# Altium PCB PCB1.PcbDoc
Units mil, origin at the board's own origin, x right, y up, seen from the top; angles counter-clockwise.
Board outline 6000 x 4000 mil, 2 copper layers (Top Layer, Bottom Layer); 15 components, 31 nets, 115 pads, 9 vias.
Unrouted connection lines stored in the file: 4.
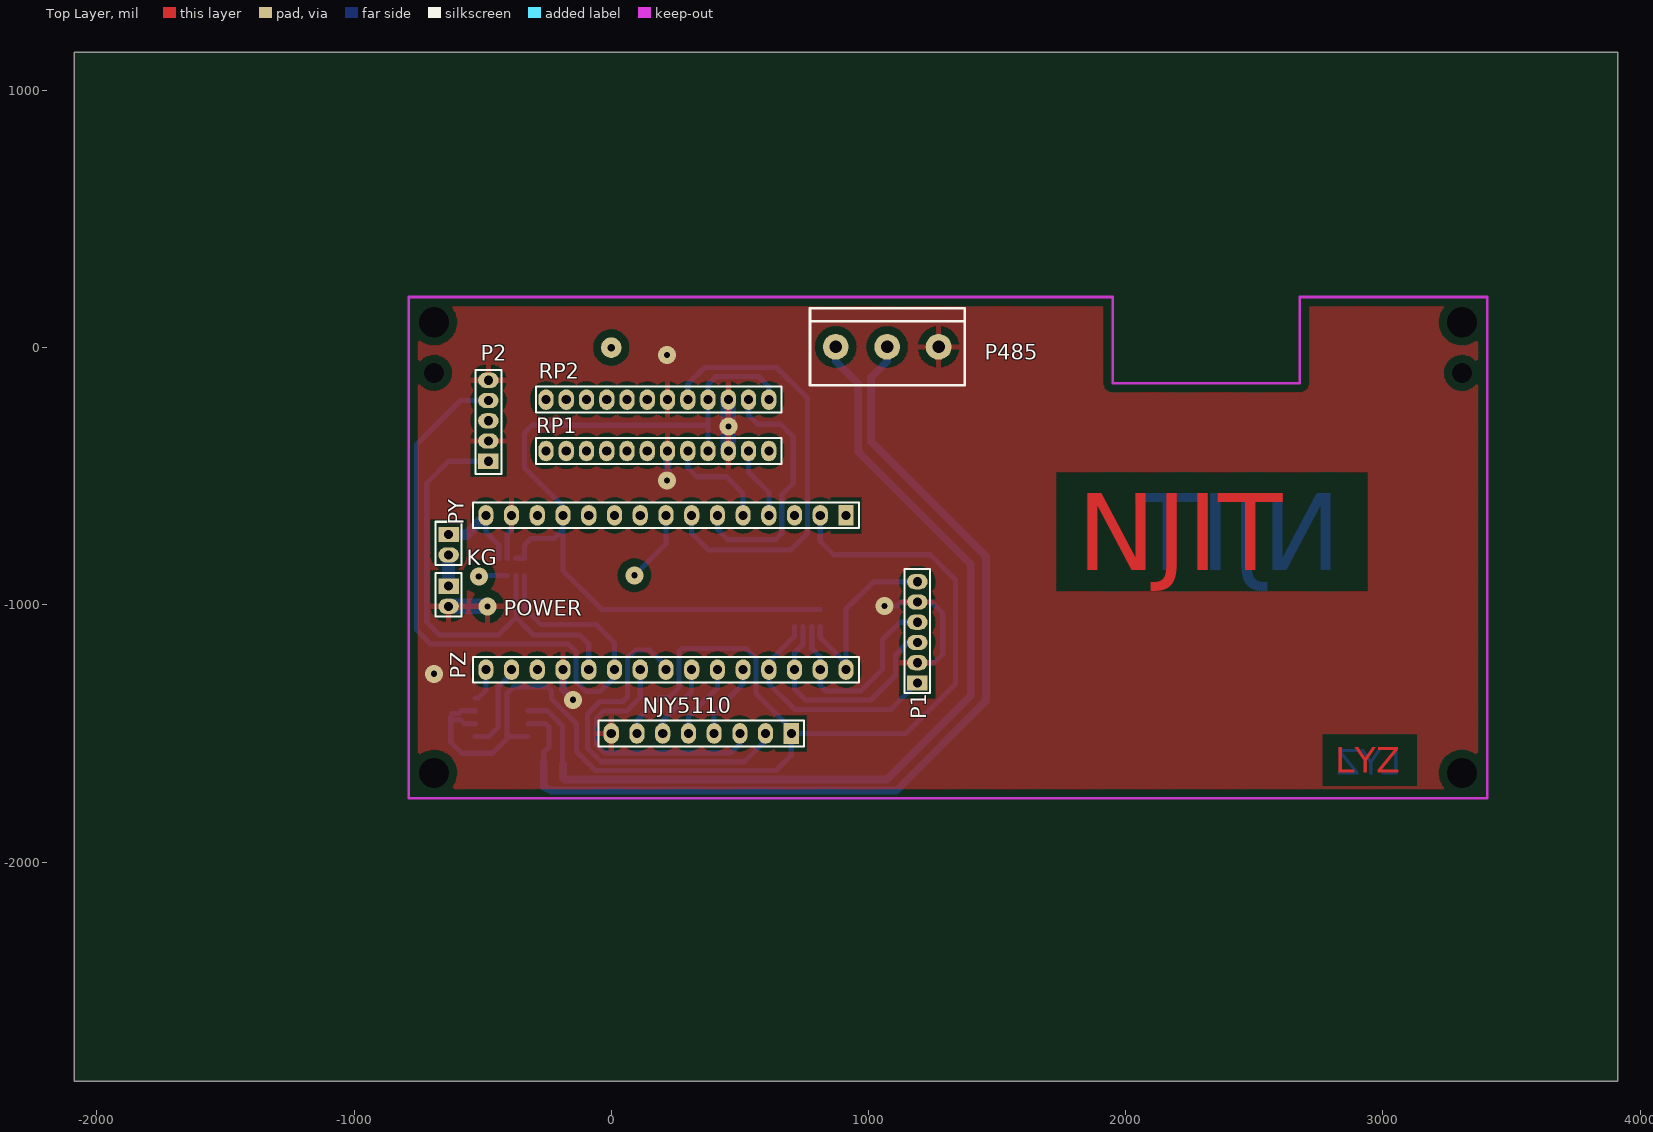
[diagram p0: Top Layer view]
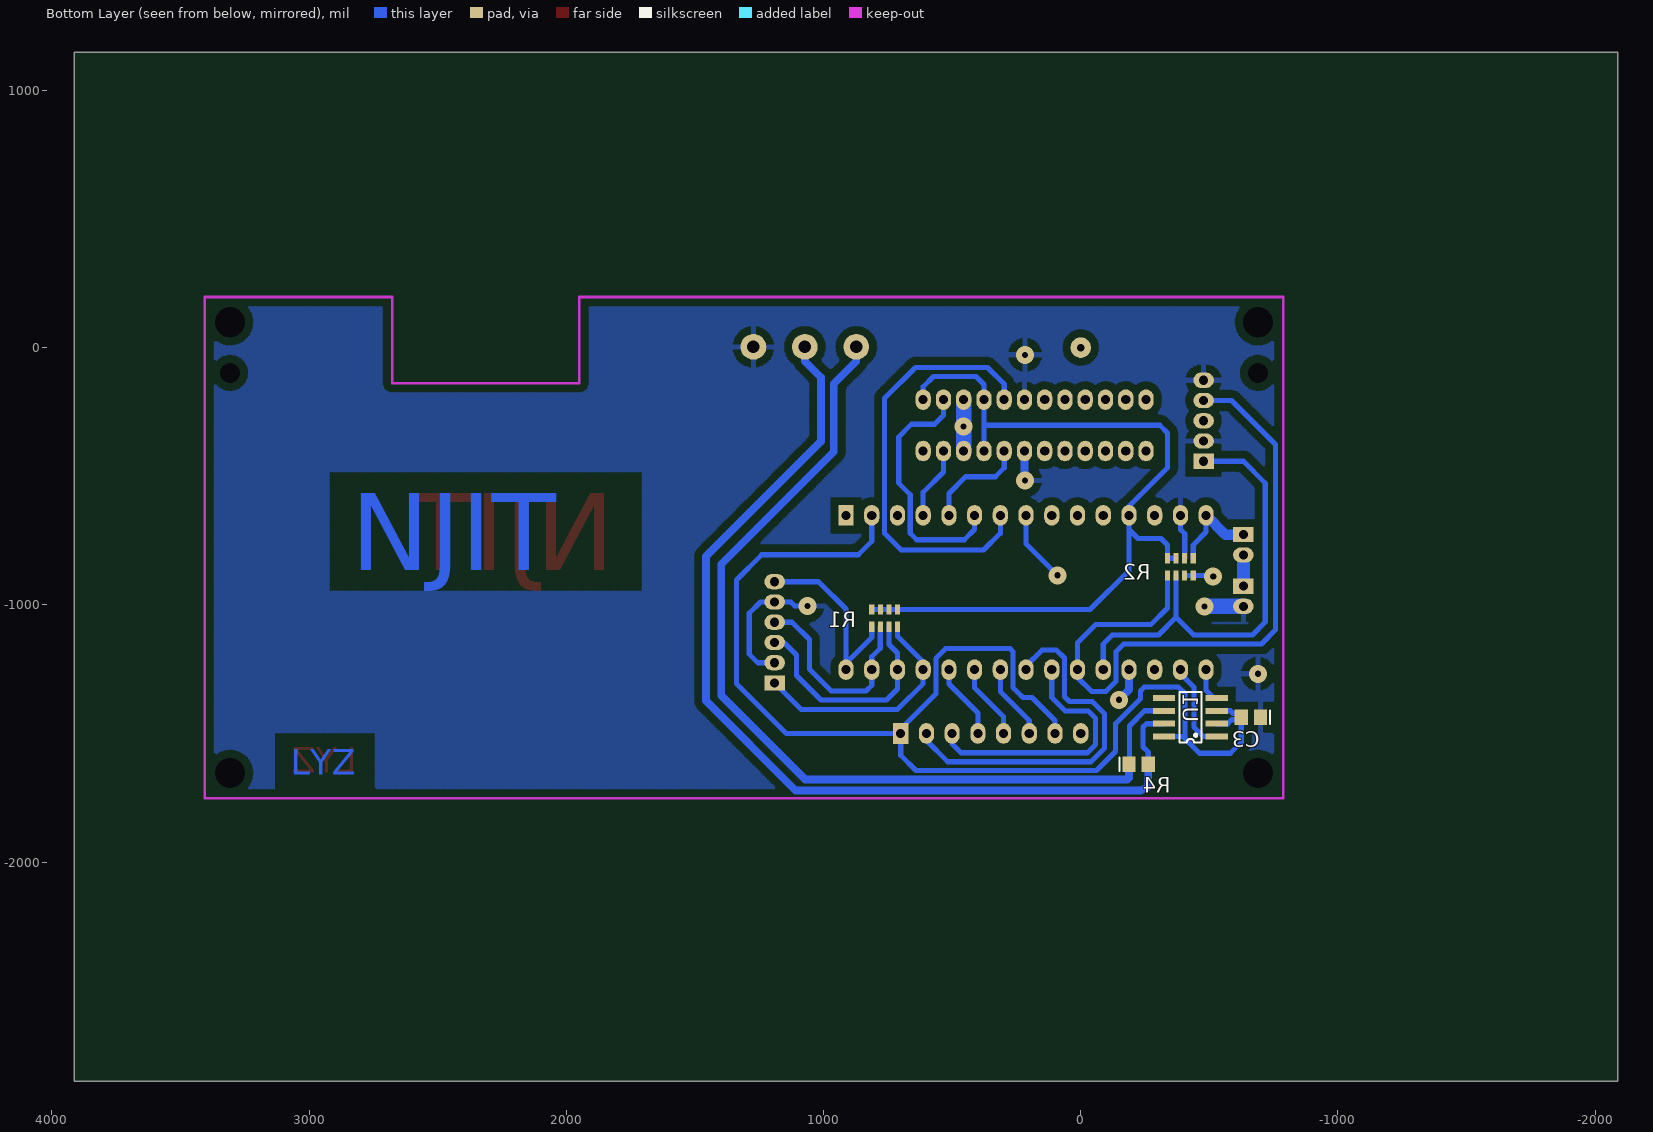
[diagram p1: Bottom Layer view, seen from below]

## Layer stack, top to bottom
Top Layer: signal copper 1.4
Dielectric: dielectric 12.6, FR-4, Dk 4.8
Bottom Layer: signal copper 1.4

## Board outline
-2087.4,-2851.97 3912.6,-2851.97 3912.6,1148.03 -2087.4,1148.03

## Design rules (kind name [scope] priority, off if disabled: settings)
Clearance [All] p1: gap=30
ComponentClearance [All] p1: gap=10 collisioncheckmode=3 verticalgap=10
PolygonConnect [All] p1: connectstyle=Relief reliefconductorwidth=20 reliefentries=4 polygonreliefangle="90 Angle"
RoutingVias [All] p1: holewidth=28 width=50 viastyle="Through Hole" minholewidth=28 minwidth=50 maxholewidth=28 maxwidth=50
SolderMaskExpansion [All] p1: expansion=4
TestPointUsage [All] p1: valid=0 allowmultiple=FALSE
Testpoint [All] p1: side=15 testpointundercomponent=TRUE minsize=40 maxsize=100 preferedsize=60 minholesize=0 maxholesize=40 preferedholesize=32 testpointgrid=1 style=1023 order=0-112345678
Width [All] p1: maxlimit=10000 minlimit=10 preferedwidth=10
18 further rules are at their usual default settings.

## Components (designator, comment, footprint, x,y, rotation, side; value= is the part's Value field where it differs from the comment)
C3 "Cap" c0805 -661.4,-1436.97 r0 bottom
KG "Header 2" HDR1X2#1 -632.4,-726.97 r270 top
NJY5110 "Header 8" HDR1X8 700,-1500 r180 top
P1 "3拨动开关" HDR1X6 1190,-1410 r90 top
P2 "2拨动开关" HDR1X5 -477.4,-441.97 r90 top
P485 "Header 3" 3p 1072.6,3.03 r0 top
POWER "Header 2" HDR1X2#2 -632.4,-926.97 r270 top
PY "Header 15" HDR1X15#1 912.6,-651.97 r180 top
PZ "Header 15" HDR1X15#2 -487.4,-1251.97 r0 top
R1 "A" 排阻 762.6,-1051.97 r0 bottom
R2 "A" 排阻 -387.4,-851.97 r180 bottom
R4 "Res2" c0805 -225,-1620 r180 bottom
RP1 "电位器" HDR1X12 612.6,-401.97 r180 top
RP2 "电位器" HDR1X12 612.6,-201.97 r180 top
U1 "MAX3485" sop8 -426.4,-1436.97 r90 bottom

## Footprints (in the part's own frame and the unit in brackets; to place one, negate y for a bottom-side part, rotate by r counter-clockwise, add the part's x,y. Pads: shape width x height; smd on the part's side, far side on the other; paste and mask are expansions set on the pad)
3p [mil]
  round 100 hole 48: 1(-200,0) 2(0,0) 3(200,0)
  silkscreen extent -300,-150 301,150
c0805 [mm] "Chip Capacitor; Body 2.0 x 1.2 mm (LxW typ)"
  rect 1.3x1.5 smd: 1(-0.95,0) 2(0.95,0)
  silkscreen extent -1.9,-0.65 -1.9,0.65
HDR1X2#1 [mm] "Connector; Header; 2 Position"
  rect 1.5x2.032 hole 0.9: 1(0,0)
  oval 1.5x2.032 hole 0.9 unplated: 2(2,0)
  silkscreen extent -1.27,-1.27 3,1.27
HDR1X2#2 [mm] "Connector; Header; 2 Position"
  rect 1.524x2.032 hole 0.9: 1(0,0)
  oval 1.5x2.032 hole 0.9: 2(2,0)
  silkscreen extent -1.27,-1.27 3,1.27
HDR1X5 [mm] "Connector; Header; 5 Position"
  rect 1.5x2.032 hole 0.9: 1(0,0)
  oval 1.5x2.032 hole 0.9: 2(2,0) 3(4,0) 4(6,0) 5(8,0)
  silkscreen extent -1.27,-1.27 9,1.27
HDR1X6 [mm] "Connector; Header; 6 Position"
  rect 1.5x2.032 hole 0.9: 1(2.7,0)
  oval 1.5x2.032 hole 0.9: 2(4.7,0) 3(6.7,0) 4(8.7,0) 5(10.7,0) 6(12.7,0)
  silkscreen extent 1.7,-1.27 13.97,1.27
HDR1X8 [mm] "Connector; Header; 8 Position"
  rect 1.5x2.032 hole 0.9: 1(0,0)
  oval 1.5x2.032 hole 0.9: 2(2.54,0) 3(5.08,0) 4(7.62,0) 5(10.16,0) 6(12.7,0) 7(15.24,0) 8(17.78,0)
  silkscreen extent -1.27,-1.27 19.05,1.27
HDR1X12 [mm] "Connector; Header; 12 Position"
  oval 1.5x2.032 hole 0.9: 1(0,0) 2(2,0) 3(4,0) 4(6,0) 5(8,0) 6(10,0) 7(12,0) 8(14,0) 9(16,0) 10(18,0) 11(20,0) 12(22,0)
  silkscreen extent -1.27,-1.27 23,1.27
HDR1X15#1 [mm] "Connector; Header; 15 Position"
  rect 1.5x2.032 hole 0.9: 1(0,0)
  oval 1.5x2.032 hole 0.9: 2(2.54,0) 3(5.08,0) 4(7.62,0) 5(10.16,0) 6(12.7,0) 7(15.24,0) 8(17.78,0) 9(20.32,0) 10(22.86,0) 11(25.4,0) 12(27.94,0) 13(30.48,0) 14(33.02,0) 15(35.56,0)
  silkscreen extent -1.27,-1.27 36.83,1.27
HDR1X15#2 [mm] "Connector; Header; 15 Position"
  oval 1.5x2.032 hole 0.9: 1(0,0) 2(2.54,0) 3(5.08,0) 4(7.62,0) 5(10.16,0) 6(12.7,0) 7(15.24,0) 8(17.78,0) 9(20.32,0) 10(22.86,0) 11(25.4,0) 12(27.94,0) 13(30.48,0) 14(33.02,0) 15(35.56,0)
  silkscreen extent -1.27,-1.27 36.83,1.27
sop8 [mm]
  rect 0.6x2.2 smd: 1(-1.905,-2.6) 2(-0.635,-2.6) 3(0.635,-2.6) 4(1.905,-2.6) 5(1.905,2.6) 6(0.635,2.6) 7(-0.635,2.6) 8(-1.905,2.6)
  silkscreen extent -2.5,-1.1 2.5,1.1
排阻 [mm]
  rect 0.5x1 smd: 1(-1.27,-0.847) 2(-1.27,0.847) 3(-0.423,-0.847) 4(-0.423,0.847) 5(0.423,-0.847) 6(0.423,0.847) 7(1.27,-0.847) 8(1.27,0.847)

## Part data
C3: "Capacitor"
KG POWER: "Header, 2-Pin"
NJY5110: "Header, 8-Pin"
P1: library part "Header 6", "Header, 6-Pin"
P2: library part "Header 5", "Header, 5-Pin"
P485: "Header, 3-Pin"
PY PZ: "Header, 15-Pin"
R1 R2: library part R1
R4: "Resistor"
RP1 RP2: library part "Header 12", "Header, 12-Pin"
U1: library part MAX3482

## Free pads (board coordinates)
  round 0 hole 118.11: 0(-688.98,-1653.54) 1(-688.98,98.43) 2(3307.09,-1653.54) 3(3307.09,98.43)
  round 80 hole 30: 0(0,0)
  round 0 hole 78.74: 5(-688.98,-98.43) 6(3307.09,-98.43)

## Via types
v1: diameter 70, hole 23.62, Top Layer to Bottom Layer, 9 vias

## Nets (pads, with @x,y where several pads share a name; then routed paths per layer and width w, separated by ;. In a path a pad name is that pad's centre, name@x,y a point inside that pad or via, vN(x,y) a via of type N, cw(c..) or ccw(c..) an arc to the next point about the centre after c; other vN are vias at no path point)
3V3: C3.2 NJY5110.1 NJY5110.7 PY.2 U1.2 U1.3 U1.8 | length 5111.4
  Bottom Layer w20: C3.2 -624,-1534.37 -581.4,-1576.97 -461.4,-1576.97 -396.4,-1511.97 U1.8 ; C3.2@-621.4,-1421.97 -591.4,-1421.97 -581.4,-1411.97 U1.3 ; C3.2@-616.4,-1446.97 -586.4,-1446.97 -571.4,-1461.97 U1.2 ; -404.89,-1520.46 -404.89,-1344.89 -380,-1320 -247,-1320 -232,-1335 -232,-1365 -135,-1462 -135,-1570 -61,-1644 641,-1644 700,-1585 NJY5110.1 1145,-1500 1338.58,-1306.42 1338.58,-903.58 1240,-805 865,-805 812.6,-752.6 PY.2 ; NJY5110.7 100,-1450 190,-1360 225,-1360 245.3,-1339.7 263,-1322 263,-1182 275,-1170 525,-1170 563,-1208 563,-1346 NJY5110.1@696,-1479
5V: PY.12 R1.1 R1.3 R1.5 R1.7 R2.2 R2.4 RP1.1 RP1.4 RP2.1 RP2.4 | length 3220.9
  Bottom Layer w20: R2.4 R2.2 -337.4,-766.97 -312.4,-741.97 -222.4,-741.97 -187.4,-706.97 ; RP1.4 376.38,-143.19 407.6,-111.97 572.6,-111.97 612.6,-151.97 RP2.1 ; 376.38,-301.97 -307.4,-301.97 -337.4,-331.97 -337.4,-466.97 -187.4,-616.97 -187.4,-867.6 -36.36,-1018.64 R1.7
A0: PY.4 RP1.2 | length 282.6
  Bottom Layer w20: RP1.2 533.86,-483.23 612.6,-561.97 PY.4
A1: PY.5 RP1.5 | length 406.4
  Bottom Layer w20: RP1.5 297.64,-467.01 332.6,-501.97 447.6,-501.97 512.6,-566.97 PY.5
A2: PY.6 RP2.2 | length 995.2
  Bottom Layer w20: PY.6 412.6,-706.97 452.6,-746.97 637.6,-746.97 662.6,-721.97 662.6,-571.97 707.6,-526.97 707.6,-346.97 658.63,-298 568.63,-298 533.86,-263.23 RP2.2
A3: PY.7 RP2.5 | length 1700.5
  Bottom Layer w20: RP2.5 297.64,-141.93 362.6,-76.97 642.6,-76.97 762.6,-196.97 762.6,-721.97 697.6,-786.97 377.6,-786.97 312.6,-721.97 PY.7
A4: PY.8 R2.5 R2.7 | length 390
  Bottom Layer w20: v1@-510.3,-885.3 R2.5 ; v1(90,-885) 212.6,-762.4 PY.8
  other v1: -515,-890
A5: PY.9
A6: PY.10
A7: PY.11
D2: P2.1 PZ.5 R2.3 | length 1800.4
  Bottom Layer w20: P2.1 -632.4,-441.97 -717.4,-526.97 -717.4,-1066.97 -667.4,-1116.97 -439.07,-1116.97 -370.73,-1048.64 ; R2.3 -370.73,-1048.64 ; PZ.5 -87.4,-1151.97 -122.4,-1116.97 -302.4,-1116.97 -370.73,-1048.64
D3: P2.4 PZ.6 R2.1 | length 2698.1
  Bottom Layer w20: P2.4 -586.18,-205.75 -757.4,-376.97 -757.4,-1096.97 -702.4,-1151.97 -167.4,-1151.97 -137.4,-1181.97 -137.4,-1296.97 -97.4,-1336.97 -42.4,-1336.97 12.6,-1281.97 12.6,-1146.97 -57.4,-1076.97 -272.4,-1076.97 -337.4,-1011.97 R2.1
D4: NJY5110.3 PZ.7 | length 1039.6
  Bottom Layer w20: PZ.7 112.6,-1360.4 61,-1412 -28,-1412 -58,-1442 -58,-1543 -26,-1575 465,-1575 500,-1540 NJY5110.3
D5: NJY5110.2 PZ.8 | length 1446.2
  Bottom Layer w20: PZ.8 212.6,-1237.6 150,-1175 95,-1175 63,-1207 63,-1357 44,-1376 -45,-1376 -93,-1424 -93,-1557 -40,-1610 517,-1610 600,-1527 NJY5110.2
D6: NJY5110.6 PZ.9 | length 294.7
  Bottom Layer w20: NJY5110.6 200,-1450 312.6,-1337.4 PZ.9
D7: NJY5110.5 PZ.10 | length 294.7
  Bottom Layer w20: NJY5110.5 300,-1435 412.6,-1322.4 PZ.10
D8: NJY5110.4 PZ.11 | length 294.7
  Bottom Layer w20: NJY5110.4 400,-1420 512.6,-1307.4 PZ.11
D9: P1.1 PZ.12 R1.2 | length 924.5
  Bottom Layer w20: R1.2 712.6,-1121.97 612.6,-1221.97 612.6,-1306.6 713,-1407 1086.7,-1407 P1.1
D10: P1.3 PZ.13 R1.4 | length 890.6
  Bottom Layer w20: R1.4 745.93,-1153.64 712.6,-1186.97 712.6,-1327.6 755,-1370 1010,-1370 1105,-1275 1105,-1195 1153.78,-1146.22 P1.3
D11: P1.4 PZ.14 R1.6 | length 816.5
  Bottom Layer w20: R1.6 779.27,-1168.64 812.6,-1201.97 812.6,-1312.6 835,-1335 970,-1335 1055,-1250 1055,-1135 1122.52,-1067.48 P1.4 ; PZ.14@805.12,-1259.45 PZ.14
D12: P1.6 PZ.15 R1.8 | length 740.1
  Bottom Layer w20: R1.8 812.6,-1126.97 PZ.15@912.6,-1226.97 ; PZ.15 912.6,-1016.54 1019.13,-910 P1.6
D13: PY.1
GND: C3.1 NJY5110.8 P1.2 P1.5 P2.2 P2.5 P485.3 POWER.2 PY.14 PZ.4 R2.6 RP1.3 RP1.6 RP2.3 RP2.6 U1.5 | length 1290.9
  Bottom Layer w20: R2.6 -404.07,-723.64 -387.4,-706.97 PY.14 ; v1(1062.99,-1003.94) 1111.77,-1003.94 1126.97,-988.74 1244.65,-988.74 1288.58,-1032.68 1288.58,-1191.73 1255.35,-1224.96 P1.2
  Bottom Layer w30: PZ.4 -187.4,-1330.6 v1(-149,-1369) ; v1@218.9,-513.61 RP1.6
  Bottom Layer w60: POWER.2 v1(-481.14,-1005.71) ; RP1.3 RP2.3
  other v1: -688.98,-1267.97 216.54,-515.97 455.12,-306 216.54,-27.97
NetKG_2: KG.2 POWER.1 | length 121.3
  Bottom Layer w50: POWER.1 KG.2
NetP485_1: P485.1 R4.1 U1.6 | length 3667
  Bottom Layer w20: U1.6 -248.03,-1411.97 -189,-1471 R4.1@-189,-1630
  Bottom Layer w30: R4.1 -187.6,-1672.4 -181,-1679 1071,-1679 1397.64,-1352.36 1397.64,-842.64 960,-405 960,-140 872.6,-52.6 P485.1
NetP485_2: P485.2 R4.2 U1.7 | length 3782.3
  Bottom Layer w20: U1.7 -255,-1461.97 -242.4,-1474.57 -242.4,-1552.4 -262.4,-1572.4 R4.2@-262.4,-1611.4
  Bottom Layer w30: R4.2@-262.4,-1611.4 -262.4,-1707.6 -233.03,-1721.97 1108.03,-1721.97 1456.69,-1373.31 1456.69,-811.69 1010,-365 1010,-115 1072.6,-52.4 P485.2
REF: PY.3
RST: PY.13 PZ.3
RX: PZ.2 U1.1 | length 349.2
  Bottom Layer w20: U1.1 -476.4,-1511.97 -440,-1475.57 -440,-1320 -387.4,-1267.4 PZ.2
TX: PZ.1 U1.4 | length 153.3
  Bottom Layer w20: U1.4 -516.97,-1361.97 -487.4,-1332.4 PZ.1 PZ.1@-473.76,-1265.61
VIN: KG.1 PY.15 R2.8 | length 363.4
  Bottom Layer w20: PY.15 -487.4,-716.97 -437.4,-766.97 R2.8
  Bottom Layer w40: KG.1 -562.4,-726.97 PY.15
pads on no net: P2.3 RP1.7 RP1.8 RP1.9 RP1.10 RP1.11 RP1.12 RP2.7 RP2.8 RP2.9 RP2.10 RP2.11 RP2.12

## Polygon pours and split planes (outlines as drawn)
GND on Top Layer "Bottom Layer-No Net" (hatched 90Degree grid 0 track 8, remove dead copper): -787.4,196.85 -787.4,-1751.97 3405.51,-1751.97 3405.51,196.85 -787.4,196.85
GND on Bottom Layer "Bottom Layer-No Net" (hatched 90Degree grid 0 track 8, remove dead copper): -787.4,196.85 -787.4,-1751.97 3405.51,-1751.97 3405.51,196.85

## Keep-outs
Keep-Out Layer:
  lines w10: -787.4,-1751.97 3405.51,-1751.97 3405.51,196.85 2677.17,196.85 2677.17,-137.8 1948.82,-137.8 1948.82,196.85 -787.4,196.85 -787.4,-1751.97

## Other copper
Top Layer:
  text "NJIT" at 1811.02,-866.14 h300
  text "LYZ" at 2814.96,-1653.54 h100
Bottom Layer:
  text "NJIT" at 2838,-865 h300
  text "LYZ" at 3072,-1660 h100